# Altium PCB DDR4_Template.PcbDoc
Units mm, origin at the board's own origin, x right, y up, seen from the top; angles counter-clockwise.
Board outline 133.55 x 31.45 mm, 2 copper layers (Top Layer, Bottom Layer); 1 components, 0 nets, 288 pads, 0 vias.
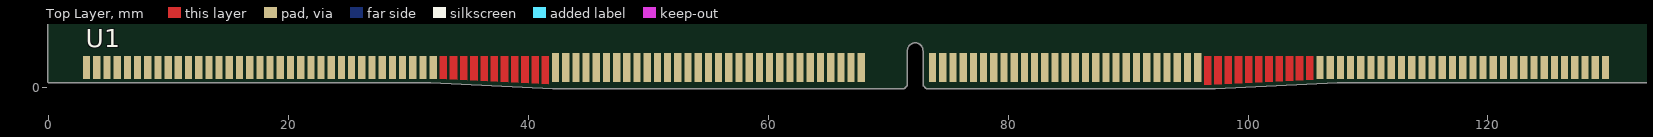
[diagram p0: Top Layer view]
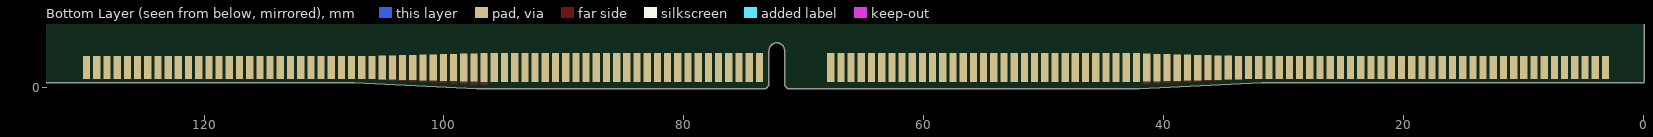
[diagram p1: Bottom Layer view, seen from below]

## Layer stack, top to bottom
Top Solder: solder mask 0.0102, Solder Resist, Dk 3.5
Top Layer: signal copper 0.0356
Dielectric 1: dielectric 0.32, FR-4, Dk 4.8
Bottom Layer: signal copper 0.0356
Bottom Solder: solder mask 0.0102, Solder Resist, Dk 3.5

## Board outline
-0.1,8 cw(c0,8) 0,8.1 1.45,8.1 ccw(c1.45,8.65) 2,8.65 2,10.35 ccw(c1.45,10.35) 1.45,10.9 0,10.9 cw(c0,11) -0.1,11 -0.1,14.6 cw(c0,14.6) 0,14.7 1.45,14.7 ccw(c1.45,15.25) 2,15.25 2,16.95 ccw(c1.45,16.95) 1.45,17.5 0,17.5 cw(c0,17.6) -0.1,17.6 -0.1,31.25 cw(c0,31.25) 0,31.35 133.35,31.35 cw(c133.35,31.25) 133.45,31.25 133.45,17.6 cw(c133.35,17.6) 133.35,17.5 131.9,17.5 ccw(c131.9,16.95) 131.35,16.95 131.35,15.25 ccw(c131.9,15.25) 131.9,14.7 133.35,14.7 cw(c133.35,14.6) 133.45,14.6 133.45,11 cw(c133.35,11) 133.35,10.9 131.9,10.9 ccw(c131.9,10.35) 131.35,10.35 131.35,8.65 ccw(c131.9,8.65) 131.9,8.1 133.35,8.1 cw(c133.35,8) 133.45,8 133.45,0.507 133.451,0.5 cw(c133.35,0.5) 133.35,0.4 107.452,0.4 97.255,-0.1 97.25,-0.1 73.2,-0.1 73.129,-0.071 72.929,0.129 72.9,0.2 72.9,3.064 ccw(c72.25,3.064) 71.605,3.131 71.605,0.2 71.575,0.129 71.375,-0.071 71.304,-0.1 42.044,-0.1 42.031,-0.1 31.848,0.4 0,0.4 cw(c0,0.5) -0.1,0.5

## Design rules (kind name [scope] priority, off if disabled: settings)
Clearance [All] p1: gap=0.254 ignorepadtopadclearanceinfootprint=FALSE except(0: Arc-Hole Track-Hole SMDPad-Hole THPad-Hole Via-Hole Fill-Hole Poly-Hole Region-Hole Text-Hole)
PolygonConnect [All] p1: connectstyle=Relief reliefconductorwidth=0.254 reliefentries=4 polygonreliefangle="90 Angle" airgapwidth=0.254
RoomDefinition DDR4_Template [InComponentClass('DDR4_Template')] p1: confinementstyle=ConfineIn formatcopy=TRUE lockcomponents=FALSE outline 0.224,2.9 0.224,0 130.424,0 130.424,2.9
RoutingVias [All] p1: holewidth=0.711 width=1.27 viastyle="Through Hole" minholewidth=0.711 minwidth=1.27 maxholewidth=0.711 maxwidth=1.27
SolderMaskExpansion [All] p1: expansion=0.102 istentingtop=FALSE
Width [All] p1: maxlimit=0.254 minlimit=0.254 preferedwidth=0.254
30 further rules are at their usual default settings.

## Components (designator, comment, footprint, x,y, rotation, side; value= is the part's Value field where it differs from the comment)
U1 "Component_1" DDR4_Footprint 3.152,1.65 r0 top

## Footprints (in the part's own frame and the unit in brackets; to place one, negate y for a bottom-side part, rotate by r counter-clockwise, add the part's x,y. Pads: shape width x height; smd on the part's side, far side on the other; paste and mask are expansions set on the pad)
DDR4_Footprint [mm]
  rect 0.6x1.9 smd paste+0 mask+0: 0(0,0) 1(0.85,0) 2(1.7,0) 3(2.55,0) 4(3.4,0) 5(4.25,0) 6(5.1,0) 7(5.95,0) 8(6.8,0) 9(7.65,0) 10(8.5,0) 11(9.35,0) 12(10.2,0) 13(11.05,0) 14(11.9,0) 15(12.75,0) 16(13.6,0) 17(14.45,0) 18(15.3,0) 19(16.15,0) 20(17,0) 21(17.85,0) 22(18.7,0) 23(19.55,0) 24(20.4,0) 25(21.25,0) 26(22.1,0) 27(22.95,0) 28(23.8,0) 29(24.65,0) 30(25.5,0) 31(26.35,0) 32(27.2,0) 33(28.05,0) 34(28.9,0) 115(102.85,0) 116(103.7,0) 117(104.55,0) 118(105.4,0) 119(106.25,0) 120(107.1,0) 121(107.95,0) 122(108.8,0) 123(109.65,0) 124(110.5,0) 125(111.35,0) 126(112.2,0) 127(113.05,0) 128(113.9,0) 129(114.75,0) 130(115.6,0) 131(116.45,0) 132(117.3,0) 133(118.15,0) 134(119,0) 135(119.85,0) 136(120.7,0) 137(121.55,0) 138(122.4,0) 139(123.25,0) 140(124.1,0) 141(124.95,0) 142(125.8,0) 143(126.65,0)
  round 0.025 smd paste+0 mask+0: 35(29.75,0) 36(30.6,0) 37(31.45,0) 38(32.3,0) 39(33.15,0) 40(34,0) 41(34.85,0) 42(35.7,0) 43(36.55,0) 44(37.4,0) 45(38.25,0) 104(93.5,0) 105(94.35,0) 106(95.2,0) 107(96.05,0) 108(96.9,0) 109(97.75,0) 110(98.6,0) 111(99.45,0) 112(100.3,0) 113(101.15,0) 114(102,0)
  rect 0.6x2.4 smd paste+0 mask+0: 46(39.1,0) 47(39.95,0) 48(40.8,0) 49(41.65,0) 50(42.5,0) 51(43.35,0) 52(44.2,0) 53(45.05,0) 54(45.9,0) 55(46.75,0) 56(47.6,0) 57(48.45,0) 58(49.3,0) 59(50.15,0) 60(51,0) 61(51.85,0) 62(52.7,0) 63(53.55,0) 64(54.4,0) 65(55.25,0) 66(56.1,0) 67(56.95,0) 68(57.8,0) 69(58.65,0) 70(59.5,0) 71(60.35,0) 72(61.2,0) 73(62.05,0) 74(62.9,0) 75(63.75,0) 76(64.6,0) 77(70.55,0) 78(71.4,0) 79(72.25,0) 80(73.1,0) 81(73.95,0) 82(74.8,0) 83(75.65,0) 84(76.5,0) 85(77.35,0) 86(78.2,0) 87(79.05,0) 88(79.9,0) 89(80.75,0) 90(81.6,0) 91(82.45,0) 92(83.3,0) 93(84.15,0) 94(85,0) 95(85.85,0) 96(86.7,0) 97(87.55,0) 98(88.4,0) 99(89.25,0) 100(90.1,0) 101(90.95,0) 102(91.8,0) 103(92.65,0)
  rect 0.6x1.9 smd far side paste+0 mask+0: 144(0,0) 145(0.85,0) 146(1.7,0) 147(2.55,0) 148(3.4,0) 149(4.25,0) 150(5.1,0) 151(5.95,0) 152(6.8,0) 153(7.65,0) 154(8.5,0) 155(9.35,0) 156(10.2,0) 157(11.05,0) 158(11.9,0) 159(12.75,0) 160(13.6,0) 161(14.45,0) 162(15.3,0) 163(16.15,0) 164(17,0) 165(17.85,0) 166(18.7,0) 167(19.55,0) 168(20.4,0) 169(21.25,0) 170(22.1,0) 171(22.95,0) 172(23.8,0) 173(24.65,0) 174(25.5,0) 175(26.35,0) 176(27.2,0) 177(28.05,0) 178(28.9,0) 259(102.85,0) 260(103.7,0) 261(104.55,0) 262(105.4,0) 263(106.25,0) 264(107.1,0) 265(107.95,0) 266(108.8,0) 267(109.65,0) 268(110.5,0) 269(111.35,0) 270(112.2,0) 271(113.05,0) 272(113.9,0) 273(114.75,0) 274(115.6,0) 275(116.45,0) 276(117.3,0) 277(118.15,0) 278(119,0) 279(119.85,0) 280(120.7,0) 281(121.55,0) 282(122.4,0) 283(123.25,0) 284(124.1,0) 285(124.95,0) 286(125.8,0) 287(126.65,0)
  rect 0.6x1.929 smd far side paste+0 mask+0: 179(29.75,0)
  rect 0.6x1.971 smd far side paste+0 mask+0: 180(30.6,0)
  rect 0.6x2.013 smd far side paste+0 mask+0: 181(31.45,0)
  rect 0.6x2.054 smd far side paste+0 mask+0: 182(32.3,0)
  rect 0.6x2.096 smd far side paste+0 mask+0: 183(33.15,0)
  rect 0.6x2.138 smd far side paste+0 mask+0: 184(34,0)
  rect 0.6x2.179 smd far side paste+0 mask+0: 185(34.85,0)
  rect 0.6x2.221 smd far side paste+0 mask+0: 186(35.7,0)
  rect 0.6x2.263 smd far side paste+0 mask+0: 187(36.55,0)
  rect 0.6x2.304 smd far side paste+0 mask+0: 188(37.4,0)
  rect 0.6x2.346 smd far side paste+0 mask+0: 189(38.25,0)
  rect 0.6x2.4 smd far side paste+0 mask+0: 190(39.1,0) 191(39.95,0) 192(40.8,0) 193(41.65,0) 194(42.5,0) 195(43.35,0) 196(44.2,0) 197(45.05,0) 198(45.9,0) 199(46.75,0) 200(47.6,0) 201(48.45,0) 202(49.3,0) 203(50.15,0) 204(51,0) 205(51.85,0) 206(52.7,0) 207(53.55,0) 208(54.4,0) 209(55.25,0) 210(56.1,0) 211(56.95,0) 212(57.8,0) 213(58.65,0) 214(59.5,0) 215(60.35,0) 216(61.2,0) 217(62.05,0) 218(62.9,0) 219(63.75,0) 220(64.6,0) 221(70.55,0) 222(71.4,0) 223(72.25,0) 224(73.1,0) 225(73.95,0) 226(74.8,0) 227(75.65,0) 228(76.5,0) 229(77.35,0) 230(78.2,0) 231(79.05,0) 232(79.9,0) 233(80.75,0) 234(81.6,0) 235(82.45,0) 236(83.3,0) 237(84.15,0) 238(85,0) 239(85.85,0) 240(86.7,0) 241(87.55,0) 242(88.4,0) 243(89.25,0) 244(90.1,0) 245(90.95,0) 246(91.8,0) 247(92.65,0) 248(93.5,0)
  rect 0.6x2.358 smd far side paste+0 mask+0: 249(94.35,0)
  rect 0.6x2.317 smd far side paste+0 mask+0: 250(95.2,0)
  rect 0.6x2.275 smd far side paste+0 mask+0: 251(96.05,0)
  rect 0.6x2.233 smd far side paste+0 mask+0: 252(96.9,0)
  rect 0.6x2.192 smd far side paste+0 mask+0: 253(97.75,0)
  rect 0.6x2.15 smd far side paste+0 mask+0: 254(98.6,0)
  rect 0.6x2.108 smd far side paste+0 mask+0: 255(99.45,0)
  rect 0.6x2.067 smd far side paste+0 mask+0: 256(100.3,0)
  rect 0.6x2.025 smd far side paste+0 mask+0: 257(101.15,0)
  rect 0.6x1.983 smd far side paste+0 mask+0: 258(102,0)
  Top Layer region: 29.45,-0.95 29.45,0.95 30.05,0.95 30.05,-0.979
  Top Layer region: 30.3,-0.992 30.3,0.95 30.9,0.95 30.9,-1.021
  Top Layer region: 31.15,-1.033 31.15,0.95 31.75,0.95 31.75,-1.063
  Top Layer region: 32,-1.075 32,0.95 32.6,0.95 32.6,-1.104
  Top Layer region: 32.85,-1.117 32.85,0.95 33.45,0.95 33.45,-1.146
  Top Layer region: 33.7,-1.158 33.7,0.95 34.3,0.95 34.3,-1.188
  Top Layer region: 34.55,-1.2 34.55,0.95 35.15,0.95 35.15,-1.229
  Top Layer region: 35.4,-1.242 35.4,0.95 36,0.95 36,-1.271
  Top Layer region: 36.25,-1.283 36.25,0.95 36.85,0.95 36.85,-1.313
  Top Layer region: 37.1,-1.325 37.1,0.95 37.7,0.95 37.7,-1.354
  Top Layer region: 37.95,-1.367 37.95,0.95 38.55,0.95 38.55,-1.396
  Top Layer region: 99.15,-1.158 99.15,0.95 99.75,0.95 99.75,-1.129
  Top Layer region: 101.7,-1.033 101.7,0.95 102.3,0.95 102.3,-1.004
  Top Layer region: 100.85,-1.075 100.85,0.95 101.45,0.95 101.45,-1.046
  Top Layer region: 98.3,-1.2 98.3,0.95 98.9,0.95 98.9,-1.171
  Top Layer region: 100,-1.117 100,0.95 100.6,0.95 100.6,-1.087
  Top Layer region: 97.45,-1.242 97.45,0.95 98.05,0.95 98.05,-1.212
  Top Layer region: 95.75,-1.325 95.75,0.95 96.35,0.95 96.35,-1.296
  Top Layer region: 93.2,-1.45 93.2,0.95 93.8,0.95 93.8,-1.421
  Top Layer region: 94.9,-1.367 94.9,0.95 95.5,0.95 95.5,-1.337
  Top Layer region: 94.05,-1.408 94.05,0.95 94.65,0.95 94.65,-1.379
  Top Layer region: 96.6,-1.283 96.6,0.95 97.2,0.95 97.2,-1.254

## Part data
U1: "Testing Compenent1"

## Nets (pads, with @x,y where several pads share a name; then routed paths per layer and width w, separated by ;. In a path a pad name is that pad's centre, name@x,y a point inside that pad or via, vN(x,y) a via of type N, cw(c..) or ccw(c..) an arc to the next point about the centre after c; other vN are vias at no path point)
pads on no net: U1.0 U1.1 U1.2 U1.3 U1.4 U1.5 U1.6 U1.7 U1.8 U1.9 U1.10 U1.11 U1.12 U1.13 U1.14 U1.15 U1.16 U1.17 U1.18 U1.19 U1.20 U1.21 U1.22 U1.23 U1.24 U1.25 U1.26 U1.27 U1.28 U1.29 U1.30 U1.31 U1.32 U1.33 U1.34 U1.35 U1.36 U1.37 U1.38 U1.39 U1.40 U1.41 U1.42 U1.43 U1.44 U1.45 U1.46 U1.47 U1.48 U1.49 U1.50 U1.51 U1.52 U1.53 U1.54 U1.55 U1.56 U1.57 U1.58 U1.59 U1.60 U1.61 U1.62 U1.63 U1.64 U1.65 U1.66 U1.67 U1.68 U1.69 U1.70 U1.71 U1.72 U1.73 U1.74 U1.75 U1.76 U1.77 U1.78 U1.79 U1.80 U1.81 U1.82 U1.83 U1.84 U1.85 U1.86 U1.87 U1.88 U1.89 U1.90 U1.91 U1.92 U1.93 U1.94 U1.95 U1.96 U1.97 U1.98 U1.99 U1.100 U1.101 U1.102 U1.103 U1.104 U1.105 U1.106 U1.107 U1.108 U1.109 U1.110 U1.111 U1.112 U1.113 U1.114 U1.115 U1.116 U1.117 U1.118 U1.119 U1.120 U1.121 U1.122 U1.123 U1.124 U1.125 U1.126 U1.127 U1.128 U1.129 U1.130 U1.131 U1.132 U1.133 U1.134 U1.135 U1.136 U1.137 U1.138 U1.139 U1.140 U1.141 U1.142 U1.143 U1.144 U1.145 U1.146 U1.147 U1.148 U1.149 U1.150 U1.151 U1.152 U1.153 U1.154 U1.155 U1.156 U1.157 U1.158 U1.159 U1.160 U1.161 U1.162 U1.163 U1.164 U1.165 U1.166 U1.167 U1.168 U1.169 U1.170 U1.171 U1.172 U1.173 U1.174 U1.175 U1.176 U1.177 U1.178 U1.179 U1.180 U1.181 U1.182 U1.183 U1.184 U1.185 U1.186 U1.187 U1.188 U1.189 U1.190 U1.191 U1.192 U1.193 U1.194 U1.195 U1.196 U1.197 U1.198 U1.199 U1.200 U1.201 U1.202 U1.203 U1.204 U1.205 U1.206 U1.207 U1.208 U1.209 U1.210 U1.211 U1.212 U1.213 U1.214 U1.215 U1.216 U1.217 U1.218 U1.219 U1.220 U1.221 U1.222 U1.223 U1.224 U1.225 U1.226 U1.227 U1.228 U1.229 U1.230 U1.231 U1.232 U1.233 U1.234 U1.235 U1.236 U1.237 U1.238 U1.239 U1.240 U1.241 U1.242 U1.243 U1.244 U1.245 U1.246 U1.247 U1.248 U1.249 U1.250 U1.251 U1.252 U1.253 U1.254 U1.255 U1.256 U1.257 U1.258 U1.259 U1.260 U1.261 U1.262 U1.263 U1.264 U1.265 U1.266 U1.267 U1.268 U1.269 U1.270 U1.271 U1.272 U1.273 U1.274 U1.275 U1.276 U1.277 U1.278 U1.279 U1.280 U1.281 U1.282 U1.283 U1.284 U1.285 U1.286 U1.287

## Silkscreen, mask and mechanical layers (free items; w line width, h text height)
Mechanical 1:
  drawing of 210 lines, arcs and shapes, not listed